# EAGLE board seeeduino (EAGLE 5.02)
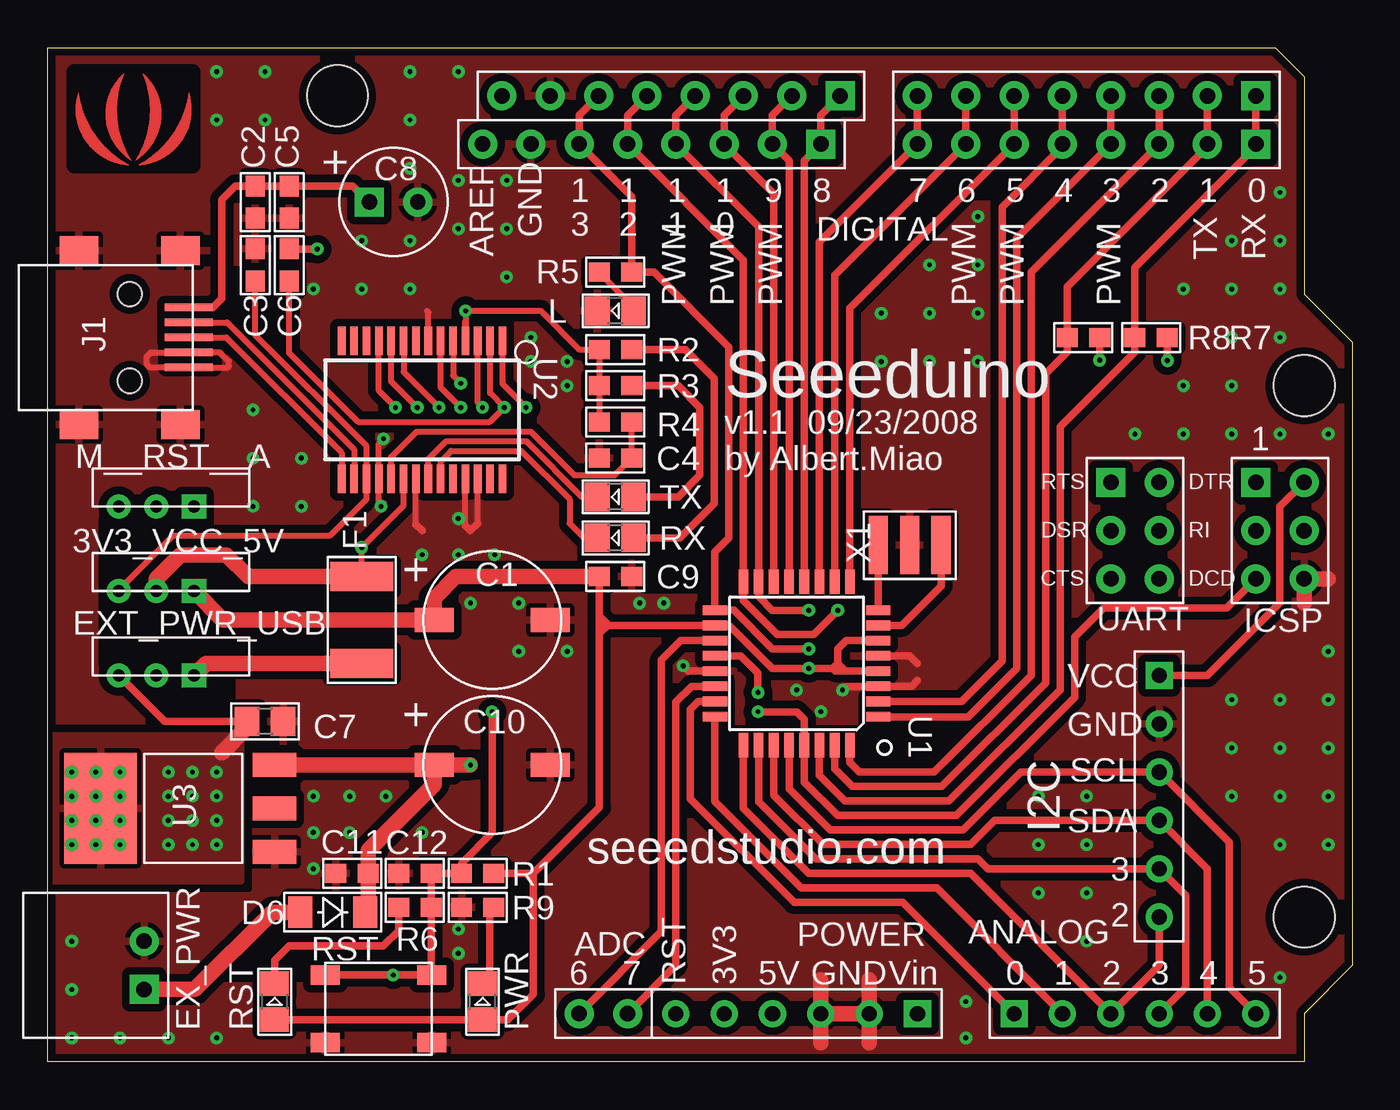
[diagram p0: board, top side]
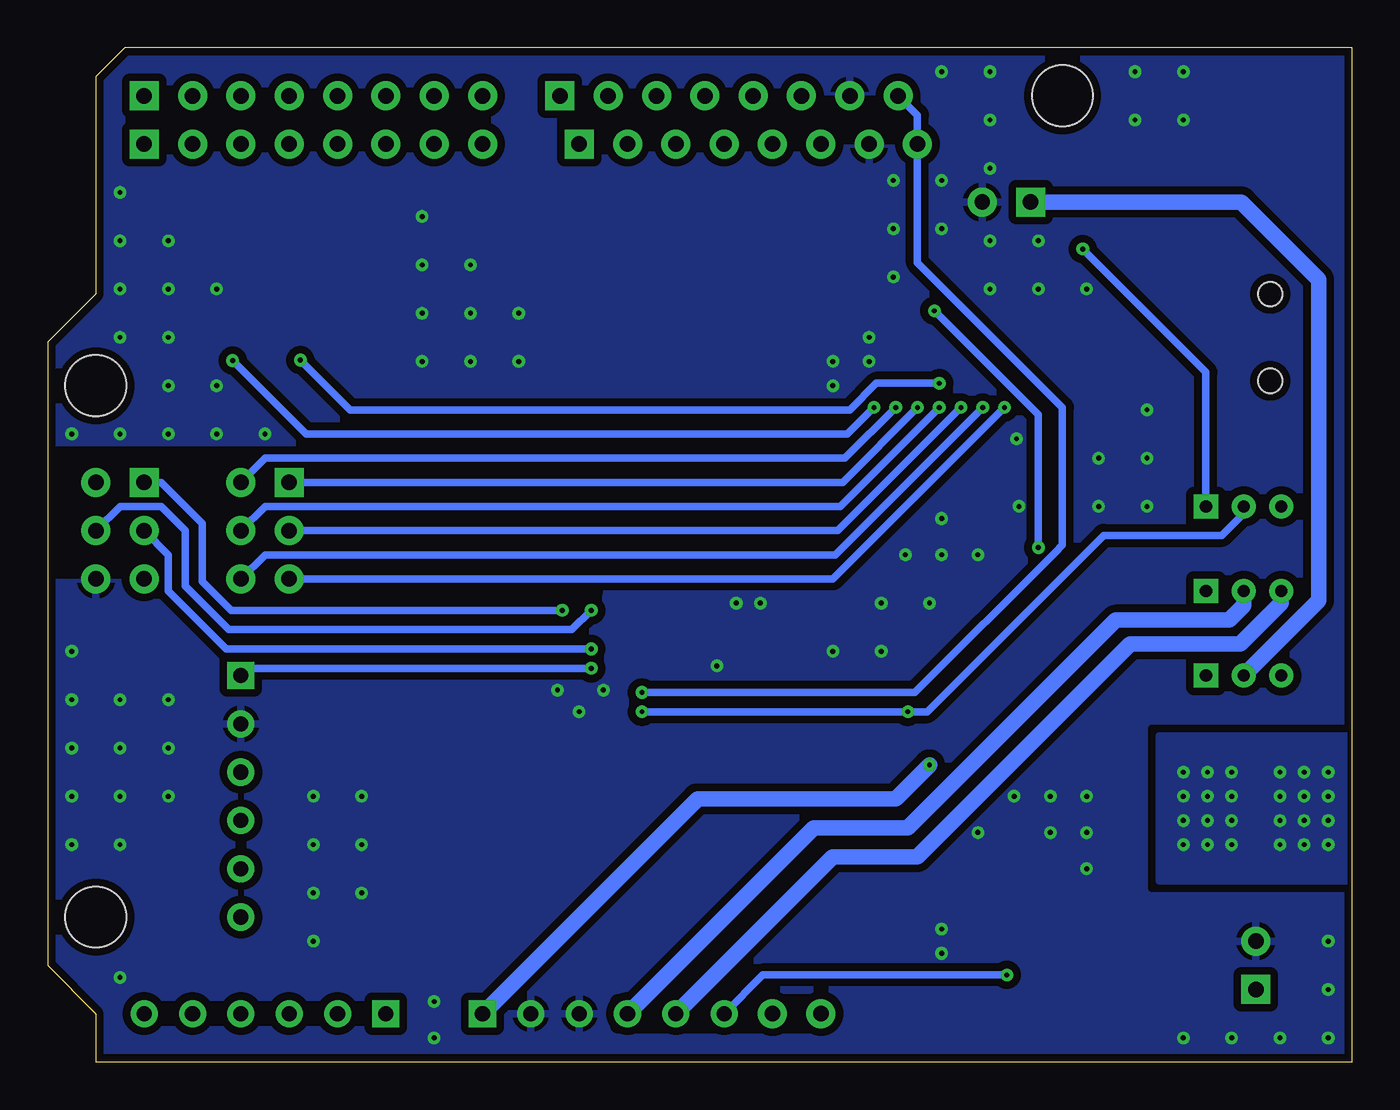
[diagram p1: board, bottom side, seen from below]

Size 68.58 x 53.34 mm. Coordinates in mm from the lower left corner, seen from the top.
Outline: 0,0 0,53.34 64.52,53.34 66.04,51.82 66.04,40.39 68.58,37.85 68.58,5.08 66.04,2.54 66.04,0 0,0
Copper layers (1*16): Top 0.035mm / dielectric 1.5mm / Bottom 0.035mm
Design rules "my rule *": minimum track width 8mil, minimum drill 10mil, track to track 8mil, track to pad 8mil, pad to pad 6mil, via to via 8mil, smd to smd 6mil, copper to edge 10mil, drill to drill 10mil, minimum pad ring 10mil, minimum via ring 8mil, stop-mask expansion 2mil, vias tented up to drill 100mil, thermal gap 10mil
Holes 3.2 mm at 15.24,50.8 66.04,7.62 66.04,7.62 66.04,35.56
tRestrict: area 27.7,2.3 to 46,2.8; area 50.5,2.3 to 63.8,2.8; area 19,30 to 22.9,31.8; area 19.5,37.1 to 20.5,38.7; area 44.7,24.6 to 45.5,25.7; area 6.2,36.4 to 8.8,37.5; area 48.3,45.7 to 50.8,47.6; area 24,48.9 to 29.6,50.2; area 31.4,25 to 35.1,26.9; area 3.3,18.8 to 9.3,28.6; area 9.1,4.8 to 17.3,8.4; area 1.4,47.1 to 7.6,52.1
bRestrict: area 50.5,2.3 to 63.8,2.8; area 23.5,48.6 to 41.4,50.4; area 45.7,48.6 to 63.5,50.4; area 40,23.5 to 67.9,31.8; area 27.7,1.9 to 38.6,3.2

## Footprints (pad centres in the part's own frame; a part is rotated, then mirrored left to right if it is on the bottom)
TOG_SW_S = drill 0.635 pad 1.27 square: COM 0,-1.981 | drill 0.635 pad 1.27 round: D1 0,1.981; D2 0,0
PANASONIC_D = smd 1.27 x 2.032: + 0,3.048; - 0,-3.048
0603 = smd 1.1 x 1: 1 -0.85,0; 2 0.85,0
0805 = smd 1.3 x 1.5: 1 -0.95,0; 2 0.95,0
C_TANT_S = drill 0.813 pad 1.524 square: + -1.27,0 | drill 0.813 pad 1.524 round: - 1.27,0
DIODE1210 = smd 1.27 x 1.651: + -1.714,0; - 1.714,0
PWR2P_2.54 = drill 0.813 pad 1.524 square: + -1.27,0 | drill 0.813 pad 1.524 round: - 1.27,0
FUSE_500MA = smd 1.524 x 3.302: 1 -2.286,0; 2 2.286,0
CK_1*6 = drill 0.8 pad 1.422 square: 1 0,6.35 | drill 0.8 pad 1.422 round: 2 0,3.81; 3 0,1.27; 4 0,-1.27; 5 0,-3.81; 6 0,-6.35
CK_2X3 = drill 0.813 pad 1.524 square: 1 -1.27,2.54 | drill 0.813 pad 1.524 round: 2 -1.27,0; 3 -1.27,-2.54; 4 1.27,-2.54; 5 1.27,0; 6 1.27,2.54
MINI_USB2 = smd 2.54 x 0.381: + -2.337,0; - -2.337,-0.787; GND0 -2.337,1.575; GND1 -2.337,0.787; VDD -2.337,-1.575 | smd 2.032 x 1.524: P$6 -1.905,4.572; P$7 -1.905,-4.572; P$8 3.429,4.572; P$9 3.429,-4.572 | hole 1.27: 0.762,2.286; 0.762,-2.286
CK_1*2 = drill 0.813 pad 1.524 round: P$1 0,1.27; P$2 0,-1.27
LED0805 = smd 1.3 x 1.5: + -0.95,0; - 0.95,0
CK_1X8 = drill 0.813 pad 1.524 square: 1 0,8.89 | drill 0.813 pad 1.524 round: 2 0,6.35; 3 0,3.81; 4 0,1.27; 5 0,-1.27; 6 0,-3.81; 7 0,-6.35; 8 0,-8.89
BTN_S = smd 1.524 x 1.016: 0A -2.794,1.905; 0B 2.794,1.905; 1A -2.794,-1.651; 1B 2.794,-1.651
ATMEGA168-20AU = smd 1.27 x 0.508: 1 -4.293,2.8; 2 -4.293,2; 3 -4.293,1.2; 4 -4.293,0.4; 5 -4.293,-0.4; 6 -4.293,-1.2; 7 -4.293,-2; 8 -4.293,-2.8; 17 4.293,-2.8; 18 4.293,-2; 19 4.293,-1.2; 20 4.293,-0.4; 21 4.293,0.4; 22 4.293,1.2; 23 4.293,2; 24 4.293,2.8 | smd 0.508 x 1.27: 9 -2.8,-4.293; 10 -2,-4.293; 11 -1.2,-4.293; 12 -0.4,-4.293; 13 0.4,-4.293; 14 1.2,-4.293; 15 2,-4.293; 16 2.8,-4.293; 25 2.8,4.293; 26 2,4.293; 27 1.2,4.293; 28 0.4,4.293; 29 -0.4,4.293; 30 -1.2,4.293; 31 -2,4.293; 32 -2.8,4.293
SSOP28 = smd 0.4 x 1.5: 1 -4.225,-3.625; 2 -3.575,-3.625; 3 -2.925,-3.625; 4 -2.275,-3.625; 5 -1.625,-3.625; 6 -0.975,-3.625; 7 -0.325,-3.625; 8 0.325,-3.625; 9 0.975,-3.625; 10 1.625,-3.625; 11 2.275,-3.625; 12 2.925,-3.625; 13 3.575,-3.625; 14 4.225,-3.625; 15 4.225,3.625; 16 3.575,3.625; 17 2.925,3.625; 18 2.275,3.625; 19 1.625,3.625; 20 0.975,3.625; 21 0.325,3.625; 22 -0.325,3.625; 23 -0.975,3.625; 24 -1.625,3.625; 25 -2.275,3.625; 26 -2.925,3.625; 27 -3.575,3.625; 28 -4.225,3.625
MC622 = smd 2.286 x 1.27: GND 4.826,-2.286; VDD5_OUT 4.826,0; VDD9 4.826,2.286 | smd 3.81 x 5.842: VDD5OUT_ -4.318,0
XTAL_NC = smd 1.016 x 3.048: 1 -1.651,0; 2 1.651,0; GND 0,0

## Placement (x,y rotation side)
3V3_VCC_5V  3V3_VCC_5V  [TOG_SW_S]  5.71,24.77 90 top
C1  100u  [PANASONIC_D]  23.37,23.24 90 top
C2  100n  [0603]  10.92,45.21 270 top
C3  100n  [0603]  10.92,41.91 270 top
C4  100n  [0603]  29.84,31.75 0 top
C5  100n  [0603]  12.7,45.21 90 top
C6  100n  [0603]  12.7,41.91 90 top
C7  10u  [0805]  11.43,17.91 180 top
C8  4.7u  [C_TANT_S]  18.19,45.21 0 top
C9  100n  [0603]  29.84,25.53 0 top
C10  100u  [PANASONIC_D]  23.37,15.62 90 top
C11  100n  [0603]  16,9.91 180 top
C12  10n  [0603]  19.3,9.91 180 top
D6  DIODE1210  [DIODE1210]  14.99,7.87 0 top
EX_PWR  PWR2P_2.54  [PWR2P_2.54]  5.08,5.08 90 top
EXT_PWR_USB  EXT_PWR_USB  [TOG_SW_S]  5.71,20.32 90 top
F1  FUSE_500MA  [FUSE_500MA]  16.51,23.24 90 top
I2C  [CK_1*6]  58.42,13.97 0 top
ICSP  CK_2X3  [CK_2X3]  64.77,27.94 0 top
J1  MINI_USB2  [MINI_USB2]  5.08,38.1 180 top
J4  CK_12  [CK_1*2]  29.21,2.54 90 top
L  LED0805  [LED0805]  29.84,39.5 180 top
M__RST__A  M__RST__A  [TOG_SW_S]  5.71,29.21 90 top
PB  CK_1X8  [CK_1X8]  32.77,50.8 270 top
PB1  CK_1X8  [CK_1X8]  31.75,48.26 270 top
PC  [CK_1*6]  57.15,2.54 90 top
PD  CK_1X8  [CK_1X8]  54.61,50.8 270 top
PD1  CK_1X8  [CK_1X8]  54.61,48.26 270 top
POWER  [CK_1*6]  39.37,2.54 270 top
PWR  LED0805  [LED0805]  22.86,3.17 90 top
R1  10k  [0603]  22.61,9.91 0 top
R2  1k  [0603]  29.84,37.47 0 top
R3  1k  [0603]  29.84,35.56 0 top
R4  R0603  [0603]  29.84,33.66 0 top
R5  1k  [0603]  29.84,41.53 180 top
R6  1k  [0603]  19.3,8.13 0 top
R7  1k  [0603]  58,38.1 0 top
R8  1k  [0603]  54.44,38.1 0 top
R9  1k  [0603]  22.61,8.13 180 top
RESET  RST  [BTN_S]  17.4,2.92 180 top
RST  LED0805  [LED0805]  11.94,3.17 90 top
RX  LED0805  [LED0805]  29.84,27.56 180 top
TX  LED0805  [LED0805]  29.84,29.72 180 top
U1  ATMEGA168-20AU  [ATMEGA168-20AU]  39.37,20.95 180 top
U2  FT232RL  [SSOP28]  19.68,34.29 180 top
U3  MC622  [MC622]  7.11,13.34 0 top
U$1  LOGO_COPPER  [LOGO_COPPER]  4.51,48.83 0 top
UART  CK_2X3  [CK_2X3]  57.15,27.94 0 top
X1  XTAL_NC  [XTAL_NC]  45.31,27.18 180 top

## Library data of the parts
3V3_VCC_5V C1 C7 C10 D6 EXT_PWR_USB L M__RST__A PWR R1-R9 RESET RST RX TX X1 = CPT_SMD
C2-C6 C9 C11 C12 = CPT_SMD; C0603: 100N
C8 = CPT_CJ
EX_PWR I2C ICSP J1 J4 PB PB1 PC PD PD1 POWER UART = CONNECTER
F1 U1-U3 = IC_SMD
U$1 = logo

## Nets
ADC6: J4.P$1 U1.19
ADC7: J4.P$2 U1.22
CTS: U2.11 UART.3
D+: J1.+ U2.15
D-: J1.- U2.16
DCD: U2.10 UART.4
DSR: U2.9 UART.2
DTR: C6.1 U2.2 UART.6
FT_RST: C4.2 R4.2 U2.19
FT_RX: R8.2 U2.5
FT_TX: R7.2 U2.1
GND: C1.- C2.2 C3.1 C4.1 C5.1 C7.1 C8.- C9.2 C10.- C11.2 C12.2 EX_PWR.- I2C.2 ICSP.4 J1.GND0 J1.GND1 J1.P$6 J1.P$7 J1.P$8 J1.P$9 L.- PB1.7 PB.7 POWER.2 POWER.3 R9.2 RESET.0A RESET.0B U1.3 U1.5 U1.21 U2.7 U2.18 U2.21 U2.25 U2.26 U3.GND X1.GND
LED_RX: RX.- U2.23
LED_TX: TX.- U2.22
N$1: D6.+ EX_PWR.+
N$2: C6.2 M__RST__A.COM
N$3: PWR.- R9.1
N$4: L.+ R5.2
N$5: R6.1 RST.-
N$7: U2.28
N$13: U2.27
N$27: U2.13
N$28: U2.14
N$29: U2.12
N$31: R2.2 RX.+
N$32: R3.2 TX.+
NC7: M__RST__A.D1
PB0: PB1.1 PB.1 U1.12
PB1: PB1.2 PB.2 U1.13
PB2: PB1.3 PB.3 U1.14
PB3: ICSP.5 PB1.4 PB.4 U1.15
PB4: ICSP.1 PB1.5 PB.5 U1.16
PB5: ICSP.2 PB1.6 PB.6 R5.1 U1.17
PC0: PC.1 U1.23
PC1: PC.2 U1.24
PC2: I2C.6 PC.3 U1.25
PC3: I2C.5 PC.4 U1.26
PC4: I2C.4 PC.5 U1.27
PC5: I2C.3 PC.6 U1.28
PD0: PD1.1 PD.1 R7.1 U1.30
PD1: PD1.2 PD.2 R8.1 U1.31
PD2: PD1.3 PD.3 U1.32
PD3: PD1.4 PD.4 U1.1
PD4: PD1.5 PD.5 U1.2
PD5: PD1.6 PD.6 U1.9
PD6: PD1.7 PD.7 U1.10
PD7: PD1.8 PD.8 U1.11
RI: U2.6 UART.5
RST: C12.1 ICSP.3 M__RST__A.D2 POWER.6 R1.1 R6.2 RESET.1A RESET.1B U1.29
RTS: U2.3 UART.1
V_REF: PB1.8 PB.8 U1.20
VCC: 3V3_VCC_5V.COM C1.+ C9.1 I2C.1 ICSP.6 PWR.+ R1.2 RST.+ U1.4 U1.6 U1.18
VDD3V3: 3V3_VCC_5V.D1 C3.2 POWER.5 U2.17
VDD5: 3V3_VCC_5V.D2 F1.2 POWER.4 R2.1 R3.1 R4.1 U2.4 U2.20
VDD5_USB: C2.1 C5.2 C8.+ EXT_PWR_USB.D2 J1.VDD
VDD9: C10.+ C11.1 D6.- POWER.1 U3.VDD9
VDD_EXT: C7.2 EXT_PWR_USB.D1 U3.VDD5OUT_
VDD_IN: EXT_PWR_USB.COM F1.1
XTAL1: U1.7 X1.1
XTAL2: U1.8 X1.2

## Tracks (layer width: path | path; a pad name or v marks a point on that pad's centre or on a via)
ADC6
  Top 0.406: U1.19 33.27,22.16 32.26,21.14 32.26,6.86 J4.P$1
ADC7
  Top 0.406: U1.22 33.85,19.75 33.02,18.92 33.02,5.08 J4.P$2
CTS  (via drill 0.25 pad 0.25)
  Top 0.305: U2.11 17.41,35.3 v18.29,34.42
  Bottom 0.406: UART.3 27.43,25.4 27.3,25.4 v18.29,34.42
D+
  Top 0.305: U2.15 15.46,32.04 9.4,38.1 J1.+ 7.11,38.1
D-
  Top 0.305: U2.16 16.11,32.21 9.44,38.89 7.2,38.89 7.19,38.9 7.18,38.89 J1.-
DCD  (via drill 0.25 pad 0.25)
  Top 0.305: U2.10 18.06,35.79 v19.43,34.42
  Bottom 0.406: UART.4 57.15,26.67 27.18,26.67 v19.43,34.42
DSR  (via drill 0.25 pad 0.25)
  Top 0.305: U2.9 18.71,36.28 v20.57,34.42
  Bottom 0.406: UART.2 27.05,27.94 v20.57,34.42
DTR  (via drill 0.25 pad 0.25)
  Top 0.305: U2.2 23.26,35.16 v24,34.42 23.24,33.66 16.33,33.66 12.7,37.29 C6.1
  Bottom 0.406: UART.6 57.15,31.75 26.67,31.75 v24,34.42
FT_RST
  Top 0.305: R4.2 30.7,31.79 30.73,31.75 C4.2 29.81,30.86 27.69,30.86 25.4,33.15 19.39,33.15 18.06,31.82 U2.19
FT_RX  (via drill 0.25 pad 0.25)
  Top 0.305: U2.5 21.31,36.09 v21.72,35.69
  Top 0.406: R8.2 55.27,38.1 55.3,38.08 v55.3,36.91
  Bottom 0.406: v21.72,35.69 25.02,35.69 26.42,34.29 52.68,34.29 v55.3,36.91
FT_TX  (via drill 0.25 pad 0.25)
  Top 0.305: U2.1 23.91,35.65 v25.15,34.42
  Top 0.406: R7.2 v58.85,36.88
  Bottom 0.406: v25.15,34.42 26.54,33.02 54.99,33.02 v58.85,36.88
GND  (via drill 0.25 pad 0.25)
  Top 0.305: U2.7 20.01,39.43 19.94,39.5 | 22.61,28.32 U2.26 | 21.96,28.2 U2.25 | 19.36,28.27 U2.21 | v17.53,29.21 17.41,29.33 U2.18 17.41,32.52 v17.65,32.77 | 5.44,37.31 J1.GND1 9.04,37.31 9.53,36.83 9.53,36.58 9.47,36.52 J1.GND0 5.38,36.52 5.21,36.7 5.21,37.08 5.44,37.31
  Top 0.406: U1.5 45.32,21.36 45.72,20.95 | U1.21 33.67,20.55 v33.4,20.83 | 45.72,20.07 45.41,19.75 U1.3 41.98,19.75 v41.78,19.56 | 22.61,28.32 22.23,27.94 21.96,28.2 | 19.36,28.27 19.68,27.94
  Top 0.813: 40.64,1.02 POWER.3 | POWER.2 43.18,4.32 | POWER.2 43.18,1.02 | POWER.3 POWER.2 | POWER.3 40.64,4.32 | 66.04,24.13 ICSP.4 67.31,25.4
  other vias: 48.26,3.17 48.26,1.27 64.77,45.72 64.77,43.18 1.27,1.27 1.27,3.81 1.27,6.35 8.89,52.07 11.43,52.07 11.43,49.53 8.89,49.53 21.59,52.07 19.05,49.53 19.05,52.07 62.23,43.18 46.35,39.37 48.9,39.37 43.81,39.37 43.81,36.83 46.35,36.83 48.9,36.83 62.23,40.64 64.77,40.64 59.69,40.64 27.3,36.83 27.3,35.56 25.4,38.1 25.4,36.83 46.35,41.91 48.9,41.91 48.9,44.45 21.59,6.99 21.59,5.71 19.68,12.06 13.97,13.97 15.88,13.97 17.78,13.97 15.88,12.06 13.97,12.06 13.97,10.16 3.81,1.27 6.35,1.27 8.89,1.27 67.31,21.59 67.31,19.05 64.77,19.05 62.23,19.05 62.23,16.51 64.77,16.51 67.31,16.51 67.31,13.97 64.77,13.97 62.23,13.97 64.77,11.43 67.31,11.43 64.77,4.45 54.61,13.97 52.07,13.97 52.07,11.43 54.61,11.43 54.61,8.89 52.07,8.89 54.61,6.35 39.37,19.56 40.64,18.41 22.23,24.13 24.77,24.13 24.77,21.59 27.3,21.59 31.11,24.13 32.38,24.13 62.23,38.1 64.77,38.1 62.23,35.56 59.69,35.56 59.69,33.02 57.15,33.02 62.23,33.02 64.77,33.02 67.31,33.02 19.68,26.67 21.59,26.67 23.5,26.67 21.59,28.57 13.34,29.21 10.79,29.21 10.79,31.75 13.34,31.75 10.79,34.29 24.13,46.35 24.13,43.81 24.13,41.27 21.59,43.81 21.59,46.35 19.05,46.99 19.05,43.18 16.51,43.18 16.51,40.64 19.05,40.64 13.97,40.64
  pour Top (isolate 0.406, rank 2): 0,0 66.17,0 66.17,2.29 68.83,4.95 68.83,37.59 66.04,40.39 66.04,51.82 64.52,53.34 0,53.34
  pour Bottom (isolate 0.406, rank 2): 0,0 66.04,0 66.04,2.54 68.58,5.08 68.58,37.85 66.04,40.39 66.04,51.82 64.52,53.34 0,53.34
LED_RX
  Top 0.305: U2.23 20.66,31.58 21.21,32.13 24.89,32.13 27.43,29.59 27.43,28.32 28.19,27.56 RX.- 28.96,27.56
LED_TX
  Top 0.305: U2.22 20.01,31.69 20.95,32.64 25.15,32.64 28.07,29.72 TX.- 28.96,29.72
N$1
  Top 0.813: EX_PWR.+ 7.75,3.81 11.81,7.87 D6.+
N$2  (via drill 0.25 pad 0.25)
  Top 0.406: C6.2 12.7,42.8 12.75,42.75 v14.17,42.75
  Bottom 0.406: M__RST__A.COM 7.7,36.27 v14.17,42.75
N$3
  Top 0.406: 22.86,4.06 PWR.- 22.86,4.19 23.24,4.57 23.24,7.87 23.46,8.09 R9.1
N$4
  Top 0.305: R5.2 28.96,41.53 30.8,39.69 L.+
N$5
  Top 0.406: R6.1 18.45,6.9 17.65,6.1 12.7,6.1 11.94,5.33 RST.-
N$31
  Top 0.406: R2.2 33.52,37.47 35.05,35.93 35.05,29.38 33.23,27.56 RX.+
N$32
  Top 0.406: R3.2 30.7,35.43 30.73,35.43 30.86,35.56 33.15,35.56 34.29,34.42 34.29,30.86 33.15,29.72 TX.+ 30.73,29.72
PB0
  Top 0.406: U1.12 39.77,47.39 PB1.1 40.64,49.78 PB.1
PB1
  Top 0.406: U1.13 38.97,47.39 PB1.2 38.1,49.78 PB.2
PB2
  Top 0.406: U1.14 38.17,45.65 PB1.3 35.56,49.78 PB.3
PB3  (via drill 0.25 pad 0.25)
  Top 0.406: v40.01,23.75 38.1,23.75 37.37,24.48 U1.15 37.37,43.91 PB1.4 33.02,49.78 PB.4
  Bottom 0.406: ICSP.5 64.77,29.21 62.61,29.21 61.34,27.94 61.34,25.02 59.05,22.73 41.02,22.73 v40.01,23.75
PB4  (via drill 0.25 pad 0.25)
  Top 0.406: v41.53,23.75 40.26,22.48 38.35,22.48 36.57,24.26 U1.16 36.57,42.17 PB1.5 30.48,49.78 PB.5
  Bottom 0.406: ICSP.1 62.62,30.48 60.45,28.32 60.45,25.27 58.93,23.75 v41.53,23.75
PB5  (via drill 0.25 pad 0.25)
  Top 0.406: v40.01,21.72 38.1,21.72 36.06,23.75 U1.17 35.08,26.82 35.81,27.56 35.81,37.59 31.88,41.53 R5.1 30.7,45.51 PB1.6 27.94,49.78 PB.6
  Bottom 0.406: ICSP.2 62.23,26.67 62.23,24.77 59.18,21.72 v40.01,21.72
PC0
  Top 0.406: U1.23 34.2,18.95 33.78,18.54 33.78,13.84 39.24,8.38 44.96,8.38 PC.1
PC1
  Top 0.406: U1.24 35.08,13.69 39.62,9.14 46.74,9.14 PC.2
PC2
  Top 0.406: U1.25 36.57,13.34 40.01,9.91 48.51,9.91 PC.3 58.42,5.08 I2C.6
PC3
  Top 0.406: U1.26 37.37,13.68 40.39,10.67 48.9,10.67 49.4,10.16 I2C.5 59.82,8.76 59.82,3.94 PC.4
PC4
  Top 0.406: U1.27 38.17,14.03 40.77,11.43 48.51,11.43 49.78,12.7 I2C.4 60.96,10.16 PC.5
PC5
  Top 0.406: U1.28 38.97,14.37 41.15,12.19 48.13,12.19 51.18,15.24 I2C.3 62.1,11.56 62.1,3.94 PC.6
PD0
  Top 0.406: U1.30 40.57,15.06 41.91,13.72 47.37,13.72 53.21,19.56 53.21,33.4 57.15,37.34 R7.1 57.15,41.78 63.5,48.13 PD1.1 PD.1
PD1
  Top 0.406: U1.31 41.37,15.4 42.29,14.48 46.99,14.48 52.45,19.94 52.45,36.2 53.59,37.34 R8.1 53.59,40.77 60.96,48.13 PD1.2 PD.2
PD2
  Top 0.406: U1.32 42.17,15.74 42.67,15.24 46.61,15.24 51.69,20.32 51.69,41.53 PD1.3 PD.3
PD3
  Top 0.406: PD.4 PD1.4 50.93,43.31 50.93,20.7 48.38,18.16 U1.1
PD4
  Top 0.406: PD.5 PD1.5 53.34,48.13 50.16,44.96 50.16,21.08 48.04,18.95 U1.2
PD5
  Top 0.406: U1.9 42.17,39.63 PD1.6 PD.6
PD6
  Top 0.406: U1.10 41.37,41.37 PD1.7 PD.7
PD7
  Top 0.406: U1.11 40.57,43.11 PD1.8 PD.8
RI  (via drill 0.25 pad 0.25)
  Top 0.305: U2.6 20.66,35.47 v21.72,34.42
  Bottom 0.406: UART.5 57.15,29.21 26.92,29.21 v21.72,34.42
RST  (via drill 0.25 pad 0.25)
  Top 0.406: 39.77,16.64 39.77,14.71 41.53,12.95 47.75,12.95 53.98,19.18 53.98,22.35 55.5,23.88 61.98,23.88 ICSP.3 | 39.77,16.64 U1.29 | 39.77,16.64 39.77,18.02 39.37,18.41 v37.34,18.41 | RESET.1B v18.16,4.57 RESET.1A | RESET.1A 20.19,4.45 | R6.2 C12.1 R1.1 | R6.2 20.15,8.09 20.07,8 | R6.2 20.15,4.61 RESET.1A | R1.1 21.84,9.91 | R1.1 21.76,10.45 23.37,12.06 v23.37,18.41
  Bottom 0.406: v37.34,18.41 v23.37,18.41 22.35,18.41 13.08,27.69 6.86,27.69 5.71,28.83 M__RST__A.D2 | POWER.6 30.99,4.57 v18.16,4.57
RTS  (via drill 0.25 pad 0.25)
  Top 0.305: U2.3 22.61,34.67 v22.86,34.42
  Bottom 0.406: UART.1 26.8,30.48 v22.86,34.42
V_REF  (via drill 0.25 pad 0.25)
  Top 0.406: U1.20 36.43,21.36 37.34,20.45 v37.34,19.43
  Bottom 0.406: v37.34,19.43 22.99,19.43 15.62,26.8 15.24,27.18 15.24,34.42 22.86,42.04 PB1.8 22.86,49.78 PB.8
VCC  (via drill 0.25 pad 0.25)
  Top 0.406: 35.18,22.99 35.18,22.95 U1.18 29.5,22.95 29.46,22.99 | 35.18,22.99 35.17,22.97 | 35.18,22.99 35.81,22.99 38.1,20.7 v40.01,20.7 41.27,20.7 | 29,23.37 C9.1 | 29,23.37 29.08,23.37 29.46,22.99 | 29.46,22.99 29.08,22.61 | RST.+ 22.79,2.23 22.86,2.16 PWR.+ 24.2,2.23 25.53,3.56 25.53,9.91 | 29,23.37 29,13.37 25.53,9.91 | R1.2 23.46,9.99 23.5,10.03 23.62,9.91 25.53,9.91 | 25.53,9.91 25.53,9.53 25.15,9.91 25.53,9.91 | U1.6 41.97,22.16 41.53,21.72 41.53,20.95 | U1.4 41.93,20.55 41.53,20.95 | 41.91,20.57 41.4,20.57 41.27,20.7 | 41.27,20.7 41.53,20.95 | 41.53,20.95 41.66,20.83 41.66,20.7 41.53,20.83 41.53,20.95 | ICSP.6 64.77,29.21 64.77,24.13 60.96,20.32 I2C.1
  Top 0.813: 3V3_VCC_5V.COM 9.22,23.24 C1.+ 20.32,24.38 21.46,25.53 C9.1
  Bottom 0.406: 58.29,20.45 I2C.1 58.04,20.7 v40.01,20.7
VDD3V3
  Top 0.305: C3.2 10.92,38.23 16.76,32.38 16.76,30.61 | 16.76,30.61 U2.17 | 16.76,30.61 16.76,29.59 14.86,27.69 6.6,27.69 3.68,24.77 3V3_VCC_5V.D1
  Bottom 0.813: POWER.5 27.3,10.79 22.86,10.79 11.68,21.97 5.91,21.97 3.73,24.15 3V3_VCC_5V.D1
VDD5  (via drill 0.25 pad 0.25)
  Top 0.305: 21.96,38.98 U2.4 21.96,37.85 21.97,37.85 v21.97,39.5 25.91,39.5 27.94,37.47 28.96,37.47 | 28.96,37.47 R2.1 | 28.96,37.47 29,37.43 R3.1 28.96,35.56 29,35.52 R4.1 | F1.2 v16.51,27.05 18.71,29.25 U2.20
  Top 0.813: F1.2 10.54,25.53 9.4,26.67 6.99,26.67 5.71,25.4 3V3_VCC_5V.D2
  Bottom 0.406: v21.97,39.5 16.51,34.04 v16.51,27.05
  Bottom 0.813: 3V3_VCC_5V.D2 5.71,24 6.48,23.24 12.45,23.24 23.37,12.32 28.32,12.32 POWER.4
VDD5_USB
  Top 0.305: 8.69,39.67 J1.VDD
  Top 0.406: 8.69,39.67 9.14,40.13 9.14,45.34 9.87,46.06 C2.1 12.66,46.06 12.7,46.1 C5.2 16.04,46.06 16.89,45.21 C8.+
  Bottom 0.813: C8.+ 5.84,45.21 1.78,41.15 1.78,24.26 EXT_PWR_USB.D2
VDD9  (via drill 0.25 pad 0.25)
  Top 0.813: C10.+ U3.VDD9 | C10.+ v22.23,15.62 | C10.+ 20.32,15.75 | D6.- 16.76,7.87 16.85,7.96 C11.1 16.85,11.14 20.32,14.61 C10.+
  Bottom 0.813: v22.23,15.62 24,13.84 34.42,13.84 POWER.1
VDD_EXT  (via drill 0.25 pad 0.25)
  Top 0.406: EXT_PWR_USB.D1 6.15,17.91 C7.2
  Top 0.813: C7.2 10.48,17.59 9.14,16.26
  other vias: 1.27,15.24 2.54,15.24 3.81,15.24 3.81,13.97 2.54,13.97 1.27,13.97 1.27,12.7 2.54,12.7 3.81,12.7 3.81,11.43 2.54,11.43 1.27,11.43 6.35,15.24 7.62,15.24 7.62,13.97 7.62,12.7 7.62,11.43 6.35,11.43 6.35,12.7 6.35,13.97 8.89,15.24 8.89,13.97 8.89,12.7 8.89,11.43
  pour Bottom: -0.64,17.14 10.16,17.14 10.16,9.53 -0.64,9.53
  pour Top: -0.25,17.14 10.16,17.14 10.16,9.53 -0.25,9.53
VDD_IN
  Top 0.813: EXT_PWR_USB.COM 8.33,20.95 F1.1
XTAL1
  Top 0.406: U1.7 44.9,22.95 46.97,25.02 X1.1 46.97,27.2
XTAL2
  Top 0.406: X1.2 43.69,27.18 43.66,27.15 U1.8

## Text on the board
Top: top layer
Bottom: bottom layer
Dimension: boardoutline&drill
tPlace: 1 | 1 | 1 | 1 | 9 | 8 | 7 | 6 | 5 | 4 | 3 | 2 | 1 | 0 | GND | 3 | 2 | 1 | 0 | DIGITAL | AREF | TX | RX | PWM | PWM | PWM | PWM | PWM | PWM | Seeeduino | v1.1 09/23/2008 | 1 | by Albert.Miao | RTS | DTR | DSR | RI | CTS | DCD | VCC | GND | SCL | SDA | seeedstudio.com | 3 | 2 | ADC | POWER | ANALOG | 6 | 7 | RST | 3V3 | 5V | GND | Vin | 0 | 1 | 2 | 3 | 4 | 5 | silktop
bPlace: silkbottom
tStop: soldermask top
bStop: soldermask bottom
tCream: padmask top
bCream: padmask bottom